# EAGLE board 2021_06_29_V7 (EAGLE 9.6.2)
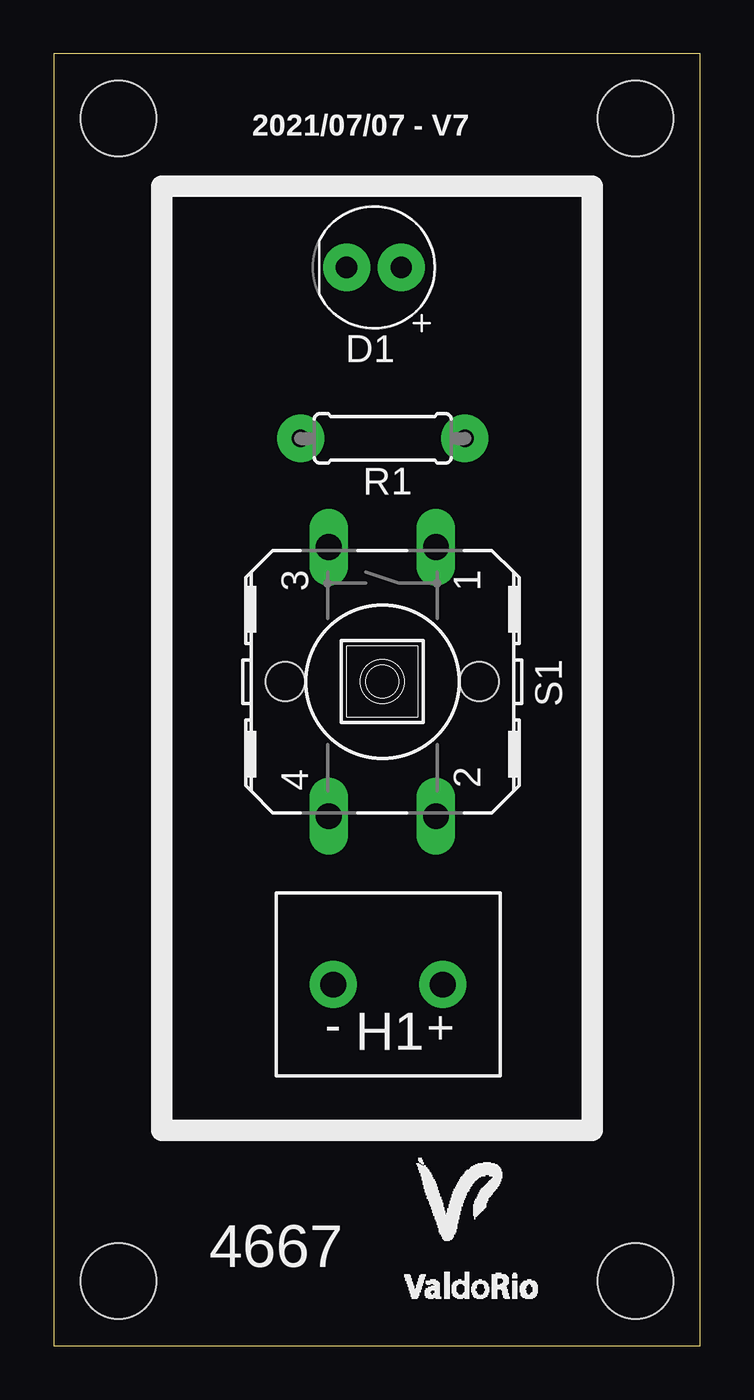
[diagram p0: board, top side]
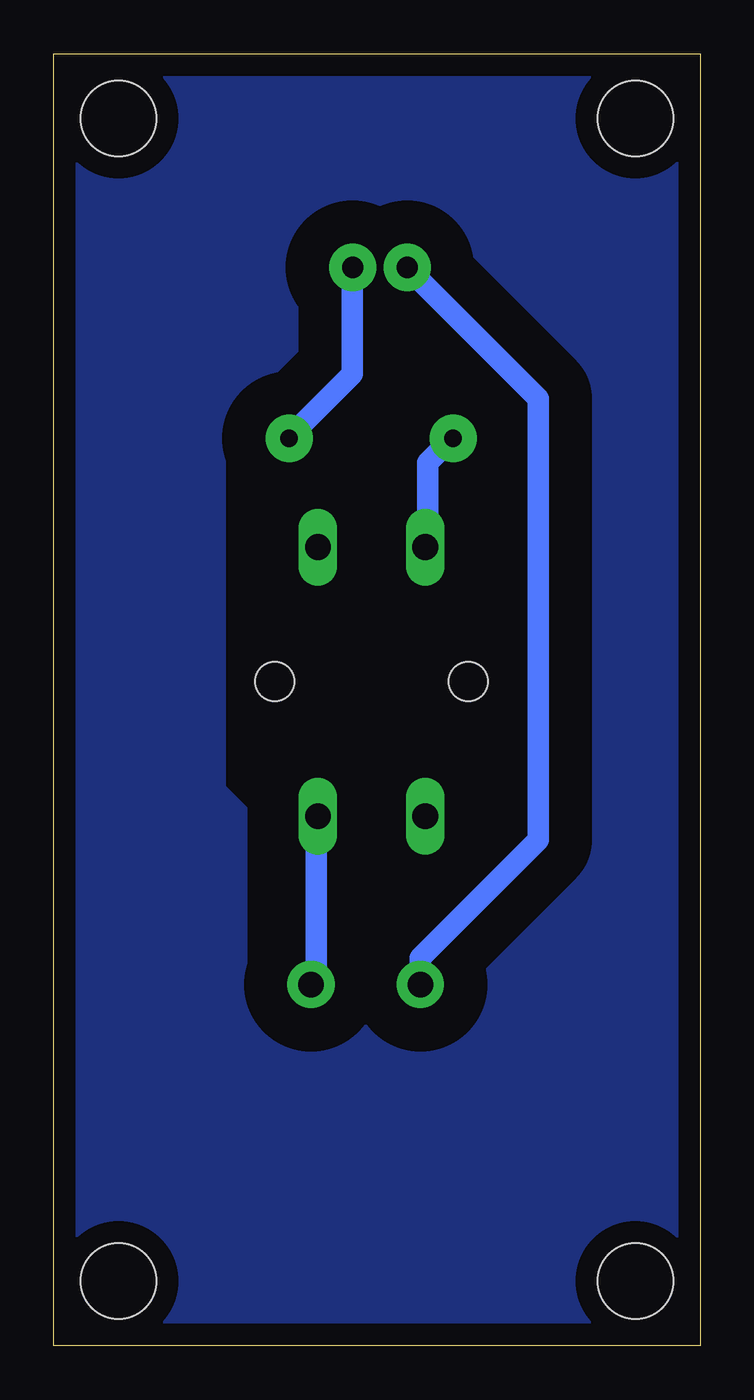
[diagram p1: board, bottom side, seen from below]

Size 30 x 60 mm. Coordinates in mm from the lower left corner, seen from the top.
Outline: 0,0 30,0 30,60 0,60 0,0
Copper layers (1*16): Top 0.035mm / dielectric 1.5mm / Bottom 0.035mm
Design rules "default *": minimum track width 1mm, minimum drill 0.35mm, track to track 2mm, track to pad 2mm, pad to pad 2mm, via to via 2mm, smd to smd 2mm, copper to edge 40mil, drill to drill 6mil, minimum pad ring 10mil, minimum via ring 8mil, stop-mask expansion 4mil, vias tented up to drill 0mil, thermal gap 10mil
Holes 3.5 mm at 27,3 3,3 3,57 27,57

## Footprints (pad centres in the part's own frame; a part is rotated, then mirrored left to right if it is on the bottom)
LEDRD254W60D565H860B_W = drill 0.981 pad 2.184: 1 -1.27,0; 2 1.27,0
TERMBLK_508-2N = drill 1.2 pad 2.184: 1 0,0; 2 5.08,0
0207/7 = drill 0.813 pad 2.184: 1 -3.81,0; 2 3.81,0
B3F-40XX = drill 1.194 long: 1 -6.248,2.489; 2 6.248,2.489; 3 -6.248,-2.489; 4 6.248,-2.489 | hole 1.803: 0,-4.496; 0,4.496

## Placement (x,y rotation side)
D1  WHITE  [LEDRD254W60D565H860B_W]  14.86,50.08 180 top
H1  282841-2  [TERMBLK_508-2N]  12.98,16.77 0 top
R1  820Ω  [0207/7]  15.27,42.14 0 top
S1  B3F-4000  [B3F-40XX]  15.25,30.84 270 top

## Library data of the parts
D1 = Opto-Electronic_1; CATEGORY: Opto-Electronic; SUB-CATEGORY: LED
H1 = Connector1; CATEGORY: Connector; DESCRIPTION: 2 Position Wire to Board Terminal Block Horizontal with Board 5.08 mm Through Hole; MANUFACTURER: TE Connectivity; MPN: 282837-2; OPERATING_TEMPERATURE: -40°C to +105°C; PART_STATUS: ACTIVE; ROHS_COMPLIANCE: RoHS Compliant; SERIES: 282837; SUBCATEGORY: Terminal Block; TYPE: Side Wire Entry
R1 = rclv1; SPICEPREFIX: R
S1 = switch-omron; MF: OMRON COMPONENTS USA; MPN: B3F-4000; OC_FARNELL: 176434; OC_NEWARK: 36K3105

## Nets
N$1: H1.2 S1.2
N$2: R1.1 S1.3
N$3: D1.1 R1.2
N$4: D1.2 H1.1

## Tracks (layer width: path | path; a pad name or v marks a point on that pad's centre or on a via)
A
  cutout Bottom: 11,45 14,48 14,44 17,41 17,39 15,39 14,40 14,41 14,42
B
  cutout Bottom: 13,21 16,18 16,23 14,21
  cutout Bottom: 21,25 21,17 20,17 20,25
CUT
  cutout Bottom: 10,37 9,36 9,26 10,25 21,25 22,26 22,36 21,37
GND
  pour Bottom (rank 2): 0,60 0,0 30,0 30,60
N$1
  Bottom 1: S1.2 17.82,24.55 17.82,16.93 17.98,16.77 H1.2
N$2
  Bottom 1: S1.3 12.64,37.2 12.64,41.01 11.58,42.07 R1.1
N$3
  Bottom 1: D1.1 16.15,50 16.15,45.12 19.04,42.22 R1.2
N$4
  Bottom 1: D1.2 7.5,43.99 7.5,23.5 13,18 13,17 H1.1
O
  cutout Bottom: 22,36 22,42 20,40 20,37 21,37
OUTROCUT
  cutout Bottom: 9,41 10,41 11,40 11,37 9,37

## Text on the board
tPlace: 2021/07/07 - V7 | - | + | 4667